# Altium PCB PCB.PcbDoc
Units mil, origin at the board's own origin, x right, y up, seen from the top; angles counter-clockwise.
Board outline 6000 x 4000 mil, 2 copper layers (Top Layer, Bottom Layer); 7 components, 11 nets, 22 pads, 0 vias.
Unrouted connection lines stored in the file: 9.
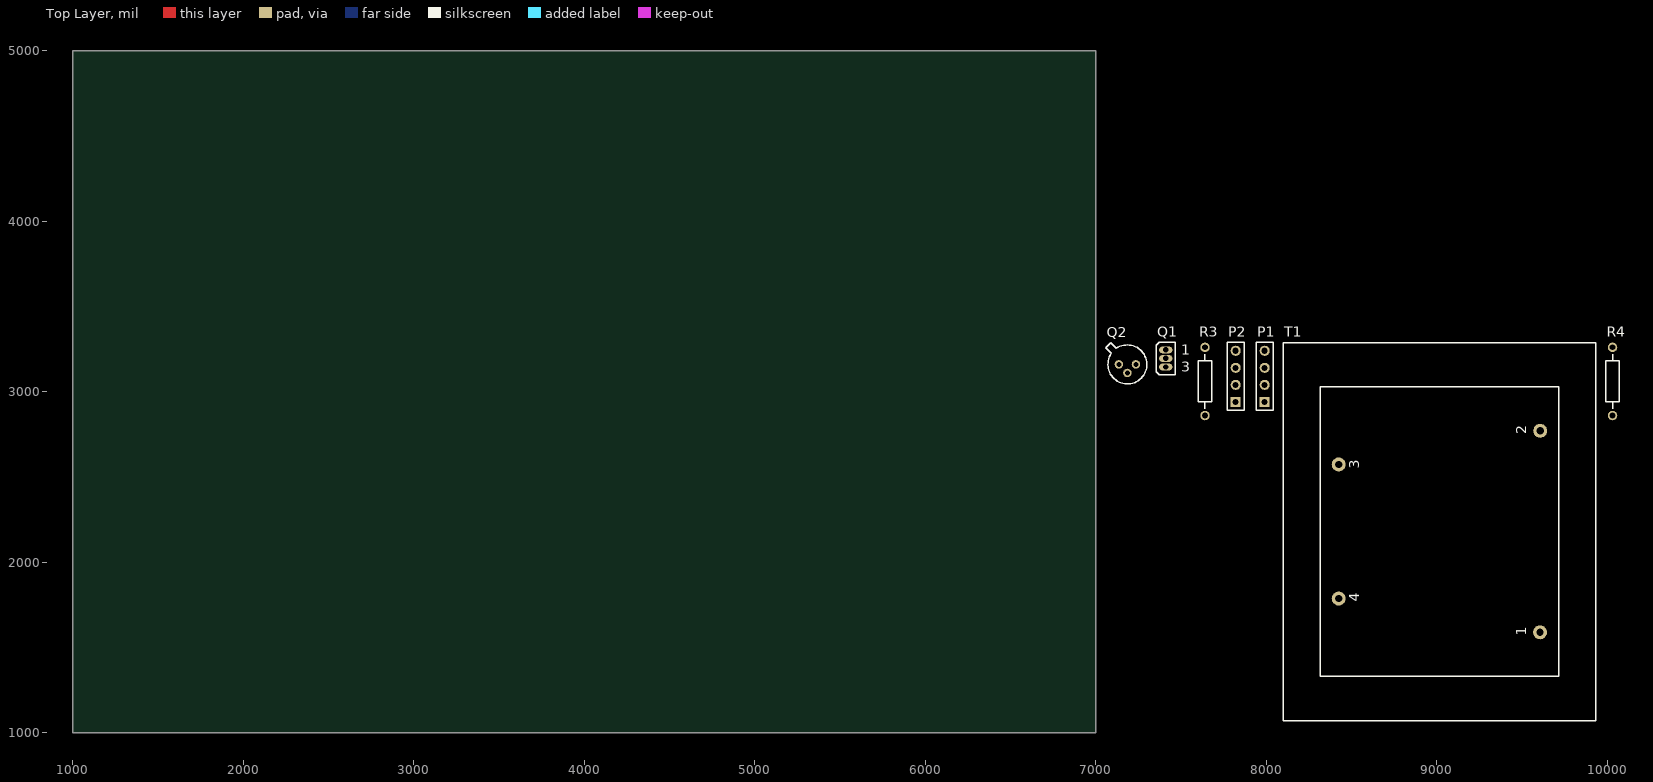
[diagram p0: Top Layer view]
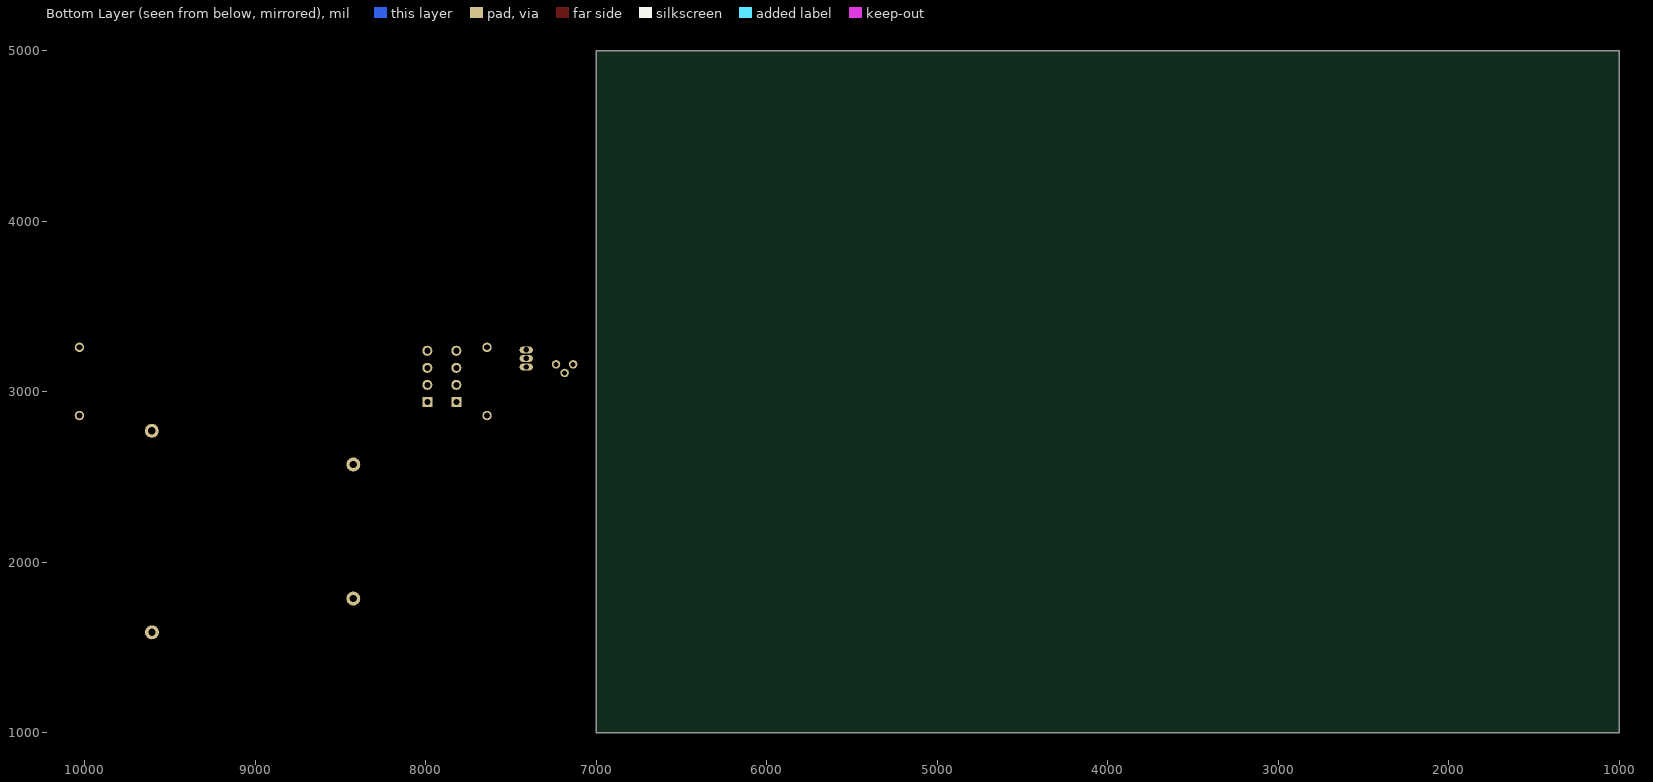
[diagram p1: Bottom Layer view, seen from below]

## Layer stack, top to bottom
Top Solder: solder mask 0.4, Solder Resist, Dk 3.5
Top Layer: signal copper 1.4
Dielectric 1: dielectric 12.6, FR-4, Dk 4.8
Bottom Layer: signal copper 1.4
Bottom Solder: solder mask 0.4, Solder Resist, Dk 3.5

## Board outline
1000,1000 7000,1000 7000,5000 1000,5000

## Design rules (kind name [scope] priority, off if disabled: settings)
Clearance [All] p1: gap=10 ignorepadtopadclearanceinfootprint=FALSE except(0: Arc-Hole Track-Hole SMDPad-Hole THPad-Hole Via-Hole Fill-Hole Poly-Hole Region-Hole Text-Hole)
PolygonConnect [All] p1: connectstyle=Relief reliefconductorwidth=10 reliefentries=4 polygonreliefangle="90 Angle" airgapwidth=10
RoomDefinition milestone1 [InComponentClass('milestone1')] p1: confinementstyle=ConfineIn formatcopy=TRUE lockcomponents=FALSE outline 7045,1060 10115,1060 10115,3400 7045,3400
RoutingVias [All] p1: holewidth=28 width=50 viastyle="Through Hole" minholewidth=28 minwidth=50 maxholewidth=28 maxwidth=50
SolderMaskExpansion [All] p1: expansion=4 istentingtop=FALSE
Width [All] p1: maxlimit=10 minlimit=10 preferedwidth=10
30 further rules are at their usual default settings.

## Components (designator, comment, footprint, x,y, rotation, side; value= is the part's Value field where it differs from the comment)
P1 "Header 4" HDR1X4 7990,2940 r90 top
P2 "Header 4" HDR1X4 7820,2940 r90 top
Q1 "MOSFET-N" E3 7410,3195 r0 top
Q2 "2N2222A" STM-TO-18-3 7185,3160 r0 top
R3 "Resistor" AXIAL-0.4 7640,3060 r90 top value=3K
R4 "Resistor" AXIAL-0.4 10030,3060 r90 top value=33
T1 "467TO5000" TRF_4 9015,2180 r90 top

## Footprints (in the part's own frame and the unit in brackets; to place one, negate y for a bottom-side part, rotate by r counter-clockwise, add the part's x,y. Pads: shape width x height; smd on the part's side, far side on the other; paste and mask are expansions set on the pad)
AXIAL-0.4 [mm] "Axial Device, Thru-Hole; 2 Leads; 0.4 in Pin Spacing"
  round 1.4 hole 0.85: 1(-5.08,0) 2(5.08,0)
  silkscreen extent -4.06,-1.02 4.06,1.02
E3 [mm] "TO, Flat Index; 3 In-Line, Axial Leads; Body Dia. 4.6mm; Lead Dia. 0.5 mm (max)"
  oval 2x1 hole 0.8: 1(0,1.27) 2(0,0) 3(0,-1.27)
  silkscreen extent -1.41,-2.41 1.41,2.41
HDR1X4 [mm] "Connector; Header; 4 Position"
  rect 1.5x1.5 hole 0.9: 1(0,0)
  round 1.5 hole 0.9: 2(2.54,0) 3(5.08,0) 4(7.62,0)
  silkscreen extent -1.27,-1.27 8.89,1.27
STM-TO-18-3 [mm] "TO, 3-Leads, Diameter 5.8mm"
  round 1.25 hole 0.75: 1(0,-1.27) 2(1.27,0) 3(-1.27,0)
  silkscreen extent -3.23,-2.9 2.9,3.23, body extent -3.23,-2.9 2.9,3.23, height 5.3
TRF_4 [mil] "Transformer; 4 Leads"
  round 82 hole 42: 1(-590.83,-590) 2(590.83,-590.83) 3(393.33,590.83) 4(-393.33,590.83)
  silkscreen extent -1108,-917 1108,917

## Part data
P1 P2: "Header, 4-Pin", LatestRevisionDate=17-Jul-2002, LatestRevisionNote="Re-released for DXP Platform.", Publisher="Altium Limited"
Q1: "IRF510PBF N-channel MOSFET Transistor; 5.6 A; 100 V; 3-Pin TO-220AB", Case/Package=TO-220AB, Continuous Drain Current (ID)=5.6A, Drain to Source Breakdown Voltage=100V, Drain to Source Resistance=540mR, Gate to Source Voltage (Vgs)=20V, Input Capacitance=180pF, Manufacturer=Vishay, Manufacturer Part Number=IRF510PBF, Max Operating Temperature=175°C, Max Power Dissipation=43W, Min Operating Temperature=-55°C, Package Quantity=50, Supplier Part Number 1=7085134P, Threshold Voltage=4V, Category=MOSFETs, ComponentLink1Description=https://datasheet.ciiva.com/8114/sihf510-8114656.pdf?src-supplier=Avnet, ComponentLink1URL=https://datasheet.ciiva.com/8114/sihf510-8114656.pdf?src-supplier=Avnet, ComponentLink2Description=https://datasheet.ciiva.com/14110/chirf510-data-en-14110759.pdf?src-supplier=Distrelec, ComponentLink2URL=https://datasheet.ciiva.com/14110/chirf510-data-en-14110759.pdf?src-supplier=Distrelec, ComponentLink3Description=https://datasheet.ciiva.com/15137/getdatasheetpartid-84718-15137579.pdf?src-supplier=Verical, ComponentLink3URL=https://datasheet.ciiva.com/15137/getdatasheetpartid-84718-15137579.pdf?src-supplier=Verical, ComponentLink4Description=https://datasheet.ciiva.com/933/sihf510-933818.pdf?src-supplier=Digi-Key, ComponentLink4URL=https://datasheet.ciiva.com/933/sihf510-933818.pdf?src-supplier=Digi-Key, ComponentLink5Description=https://datasheet.ciiva.com/18432/70078850-18432459.pdf?src-supplier=Allied+Electronics, ComponentLink5URL=https://datasheet.ciiva.com/18432/70078850-18432459.pdf?src-supplier=Allied+Electronics, Contact Plating=Tin,Matte, Current Rating=5.6A, Drain to Source Voltage (Vdss)=100V, Drain-source On Resistance-Max=540mR, Element Configuration=Single, Fall Time=9.4ns, Height=9.01mm, LatestRevisionDate=17-Jul-2002, LatestRevisionNote="Re-released for DXP Platform.", Lead Free="Lead Free", Length=10.41mm, Mount="Through Hole", Nominal Vgs=4V, Number of Channels=1, Number of Elements=1, Number of Pins=3, On-State Resistance=540mR, PackageDescription="TO, Flat Index; 3 In-Line, Axial Leads; Body Dia. 4.6mm; Lead Dia. 0.5 mm (max)", PackageReference=E3, PackageVersion=1995/1996, Packaging=Rail/Tube, Polarity=N-CHANNEL, Polarization=N, Power Dissipation=43W, Pricing 1="10=1.10000, 100=0.68800, 250=0.64700, 1000=0.50100 (USD)", Published=8-Jun-2000, Publisher="Altium Limited", Radiation Hardening=No, Rds On Max=540mR, REACH SVHC=Unknown, Recovery Time=200ns, Rise Time=16ns, RoHS=Yes, RoHS Compliant=Yes, Stock 1=1, Supplier 1=RSComponents, Turn-Off Delay Time=15ns, Turn-On Delay Time=6.9ns, Voltage Rating (DC)=100V, Weight=0.211644oz, Width=4.7mm
Q2: library part CMP-2000-05381-1, "High Speed Switch, 0.6 A IC, -65 to 175 degC, 3-Pin TO-18, RoHS, Bulk", Collector Emitter Voltage V(br)ceo=40V, DC Collector Current=600mA, DC Current Gain hFE=300hFE, Manufacturer=STMicroelectronics, Operating Temperature Max=175degC, Package Description="3-Pin Through Hole Device, Dia 5.8 mm, Pitch 1.27 mm", Package Reference=TO-18-3, Power Dissipation Pd=500mW, Transistor Case Style=TO-18, Transition Frequency ft=300MHz, Automotive Qualification Standard=-, Datasheet URL=https://datasheet.ciiva.com/25917/cd00003223-25917094.pdf, Datasheet Version=Feb-03, Manufacturer URL=http://www.st.com/, No. of Pins=3Pins, Product Range=-, Transistor Polarity=NPN
R3: "Res Wirewound 3K Ohm 5% 5W ±30ppm/°C Ceramic Hi Temp Sil AXL Thru-Hole Bulk", Case/Package=Axial, Manufacturer="Vishay BCcomponents", Manufacturer Part Number=MBA02040C3001FC100, Max Operating Temperature=155°C, Max Power Dissipation=400mW, Min Operating Temperature=-55°C, Package Quantity=1, Resistance=3kR, Resistor Type="Thin Film", Temperature Coefficient=50ppm/°C, Tolerance=1%, Category="Through-Hole Resistors", ComponentLink1Description=http://www.alliedelec.com/m/d/72a9b4b9281933b6a3b8fa3f9583e3eb.pdf?src-supplier=Allied+Electronics, ComponentLink1URL=http://www.alliedelec.com/m/d/72a9b4b9281933b6a3b8fa3f9583e3eb.pdf?src-supplier=Allied+Electronics, ComponentLink2Description=http://uk.rs-online.com/webdocs/09bb/0900766b809bb010.pdf?src-supplier=RSComponents, ComponentLink2URL=http://uk.rs-online.com/webdocs/09bb/0900766b809bb010.pdf?src-supplier=RSComponents, ComponentLink3Description=http://components.arrow.com/part/dataview/0323_01833110?src-supplier=Arrow+Europe, ComponentLink3URL=http://components.arrow.com/part/dataview/0323_01833110?src-supplier=Arrow+Europe, ComponentLink4Description=http://www.vishay.com/docs/28766/28766.pdf?src-supplier=Avnet, ComponentLink4URL=http://www.vishay.com/docs/28766/28766.pdf?src-supplier=Avnet, ComponentLink5Description=http://www.vishay.com/docs/28766/mbxsma.pdf?src-supplier=Digi-Key, ComponentLink5URL=http://www.vishay.com/docs/28766/mbxsma.pdf?src-supplier=Digi-Key, ComponentLink6Description=http://www.vishay.com/docs/28766/28766.pdf?src-supplier=Avnet+Europe, ComponentLink6URL=http://www.vishay.com/docs/28766/28766.pdf?src-supplier=Avnet+Europe, ComponentLink7Description=https://datasheet.ciiva.com/2723/alsralvr-2723471.pdf?src-supplier=Digi-Key, ComponentLink7URL=https://datasheet.ciiva.com/2723/alsralvr-2723471.pdf?src-supplier=Digi-Key, ComponentLink8Description=https://datasheet.ciiva.com/8837/alsralvr-8837660.pdf?src-supplier=Avnet, ComponentLink8URL=https://datasheet.ciiva.com/8837/alsralvr-8837660.pdf?src-supplier=Avnet, Construction=Cylindrical, Contact Plating=Tin, Diameter=1.6mm, Features="Automotive AEC-Q200", Lead Free="Lead Free", Lead Length=38.1mm, Length=3.6mm, Military Standard=Not, Mount="Through Hole", Number of Terminations=2, Packaging="Tape and Reel", Power Rating=400mW, Pricing 1="100=0.13400, 500=0.12500, 1000=0.11500, 2500=0.10600, 5000=0.09200 (USD)", Pricing 2="1=1.57000, 10=1.38900, 25=1.28760, 50=1.21200, 100=1.06050, 250=0.90900, 500=0.75750, 1000=0.65650, 5000=0.63630 (USD)", Radiation Hardening=No, RoHS=Yes, RoHS Compliant=Yes, Series="MBA 0204 - Professional", SimulationGenericComponent=True, Stock 1=1, Stock 2=53, Supplier 1=RSComponents, Supplier 2=Digi-Key, TC1=0, TC2=0, Termination=Axial, Width=7.92mm
R4: "Resistor; Wirewound; Res 33 Ohms; Pwr-Rtg 5 W; Tol 1%; Axial; Silicone-Ceramic", Case/Package=Axial, Manufacturer=Piher, Manufacturer Part Number=N6S25T0C-504-3030, Max Operating Temperature=275°C, Max Power Dissipation=5W, Min Operating Temperature=25°C, Package Quantity=25, Resistance=33R, Resistance Tolerance=1%, Resistor Type=Wirewound, Temperature Coefficient=20ppm/°C, Voltage Rating=460V, Category="Through-Hole Resistors", ComponentLink1Description=https://datasheet.ciiva.com/2762/res-40-2762276.pdf?src-supplier=Digi-Key, ComponentLink1URL=https://datasheet.ciiva.com/2762/res-40-2762276.pdf?src-supplier=Digi-Key, ComponentLink2Description=https://datasheet.ciiva.com/5632/40-series-5632314.pdf?src-supplier=Mouser, ComponentLink2URL=https://datasheet.ciiva.com/5632/40-series-5632314.pdf?src-supplier=Mouser, ComponentLink3Description=https://datasheet.ciiva.com/15771/40-series-15771879.pdf?src-supplier=Onlinecomponents.com, ComponentLink3URL=https://datasheet.ciiva.com/15771/40-series-15771879.pdf?src-supplier=Onlinecomponents.com, ComponentLink4Description=https://datasheet.ciiva.com/16770/70022288-16770455.pdf?src-supplier=Allied+Electronics, ComponentLink4URL=https://datasheet.ciiva.com/16770/70022288-16770455.pdf?src-supplier=Allied+Electronics, Diameter=8.7mm, Lead Free="Lead Free", Length=23.8mm, Mount="Through Hole", Number of Pins=2, Number of Terminations=2, Packaging=Bulk, Power Rating=5W, Pricing 1="1=0.48000, 10=0.44800, 25=0.40000, 50=0.38640, 100=0.35870, 250=0.35184, 500=0.32424, 1000=0.27595, 5000=0.22766 (USD)", Pricing 2="1=1.74000, 10=1.54000, 25=1.42000, 50=1.34000, 100=1.11000, 500=0.81100 (USD)", REACH SVHC=Unknown, RoHS=No, RoHS Compliant=Yes, Series="Ohmicone® 40", SimulationGenericComponent=True, Stock 1=1473, Stock 2=2, Supplier 1=Digi-Key, Supplier 2=Newark, Supplier Part Number 2=64K9118, TC1=0, TC2=0, Termination=Axial, Tolerance=1%, Voltage Rating (DC)=460V
T1: library part "Trans Ideal", "Transformer (Ideal)", LatestRevisionDate=17-Jul-2002, LatestRevisionNote="Re-released for DXP Platform.", PackageDescription="Transformer; 4 Leads", PackageReference=TRF_4, Published=8-Jun-2000, Publisher="Altium Limited"

## Nets (pads, with @x,y where several pads share a name; then routed paths per layer and width w, separated by ;. In a path a pad name is that pad's centre, name@x,y a point inside that pad or via, vN(x,y) a via of type N, cw(c..) or ccw(c..) an arc to the next point about the centre after c; other vN are vias at no path point)
GND: P1.1 P2.3 P2.4 Q1.3 T1.4
NetC1_2: T1.3
NetC2_2: P1.4
NetC4_1: Q2.2
NetC4_2: Q1.2
NetC5_2: Q2.1 R3.1
NetQ1_1: Q1.1 T1.2
NetQ2_3: Q2.3
NetR4_1: R4.1
PA_IN: P2.1
VCC: P1.3 R3.2 R4.2 T1.1
pads on no net: P1.2 P2.2

## Text inside footprints (layer, text, board x,y; h text height)
Q1: Top Overlay "1" at 7499.57,3216.85 h59.05; Top Overlay "3" at 7499.57,3117.72 h59.05
T1: Top Overlay "1" at 9525,1569.17 h59.06 r90; Top Overlay "2" at 9525,2749.17 h59.06 r90; Top Overlay "4" at 8545,1769.17 h59.06 r90; Top Overlay "3" at 8545,2549.17 h59.06 r90